# Altium PCB FootprintTM1620.pcbdoc
Units mm, origin at the board's own origin, x right, y up, seen from the top; angles counter-clockwise.
Board outline 25.77 x 24.7 mm, 2 copper layers (Top Layer, Bottom Layer); 1 components, 0 nets, 20 pads, 0 vias.
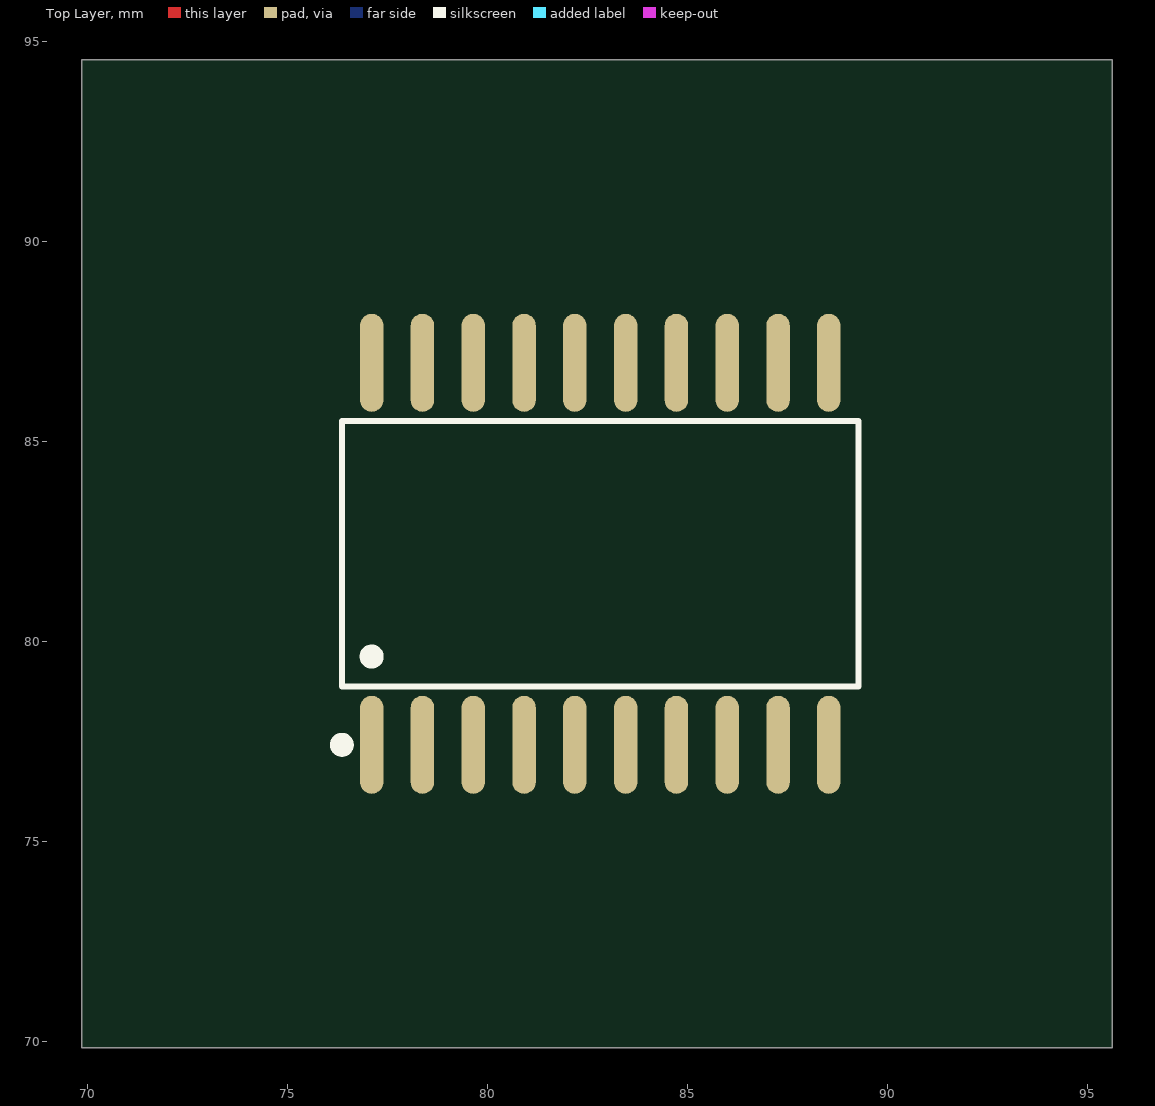
[diagram p0: Top Layer view]
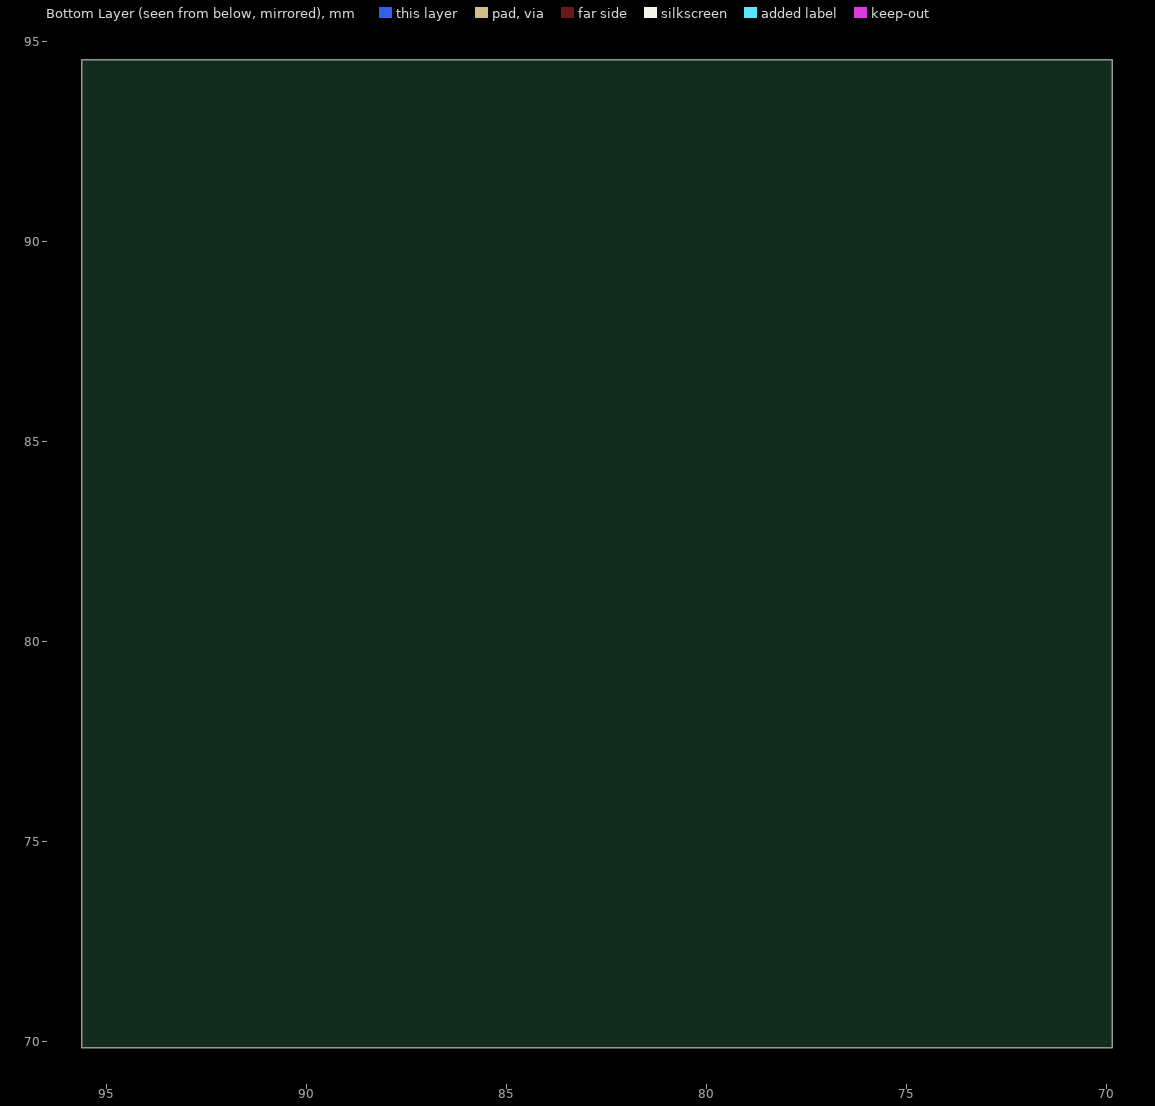
[diagram p1: Bottom Layer view, seen from below]

## Layer stack, top to bottom
Top Layer: signal copper (thickness not stored)
Dielectric: dielectric 0.32, FR-4, Dk 4.8
Bottom Layer: signal copper (thickness not stored)

## Board outline
95.618,69.85 69.85,69.85 69.85,94.55 95.618,94.55

## Components (designator, comment, footprint, x,y, rotation, side; value= is the part's Value field where it differs from the comment)
? "SOP-20_L13.2-W7.8-P1.27-LS10.4-BL" SOP-20_L13.2-W7.8-P1.27-LS10.4-BL 82.812,82.2 r0 top

## Footprints (in the part's own frame and the unit in brackets; to place one, negate y for a bottom-side part, rotate by r counter-clockwise, add the part's x,y. Pads: shape width x height; smd on the part's side, far side on the other; paste and mask are expansions set on the pad)
SOP-20_L13.2-W7.8-P1.27-LS10.4-BL [mm]
  oval 0.588x2.45 smd: 1(-5.715,-4.775) 2(-4.445,-4.775) 3(-3.175,-4.775) 4(-1.905,-4.775) 5(-0.635,-4.775) 6(0.635,-4.775) 7(1.905,-4.775) 8(3.175,-4.775) 9(4.445,-4.775) 10(5.715,-4.775) 11(5.715,4.775) 12(4.445,4.775) 13(3.175,4.775) 14(1.905,4.775) 15(0.635,4.775) 16(-0.635,4.775) 17(-1.905,4.775) 18(-3.175,4.775) 19(-4.445,4.775) 20(-5.715,4.775)
  silkscreen extent -6.61,-4.92 6.46,3.32

## Nets (pads, with @x,y where several pads share a name; then routed paths per layer and width w, separated by ;. In a path a pad name is that pad's centre, name@x,y a point inside that pad or via, vN(x,y) a via of type N, cw(c..) or ccw(c..) an arc to the next point about the centre after c; other vN are vias at no path point)
pads on no net: ?.1 ?.2 ?.3 ?.4 ?.5 ?.6 ?.7 ?.8 ?.9 ?.10 ?.11 ?.12 ?.13 ?.14 ?.15 ?.16 ?.17 ?.18 ?.19 ?.20